# Altium PCB F429-F7-核心板整体封装.PcbDoc
Units mil, origin at the board's own origin, x right, y up, seen from the top; angles counter-clockwise.
Board outline 3322.65 x 1870.08 mil, 6 copper layers (Top, GND2, ART3, ART4, POWER5, Bottom), stack 58.1 mil thick; 9 components, 1 nets, 174 pads, 0 vias.
Unrouted connection lines stored in the file: 1.
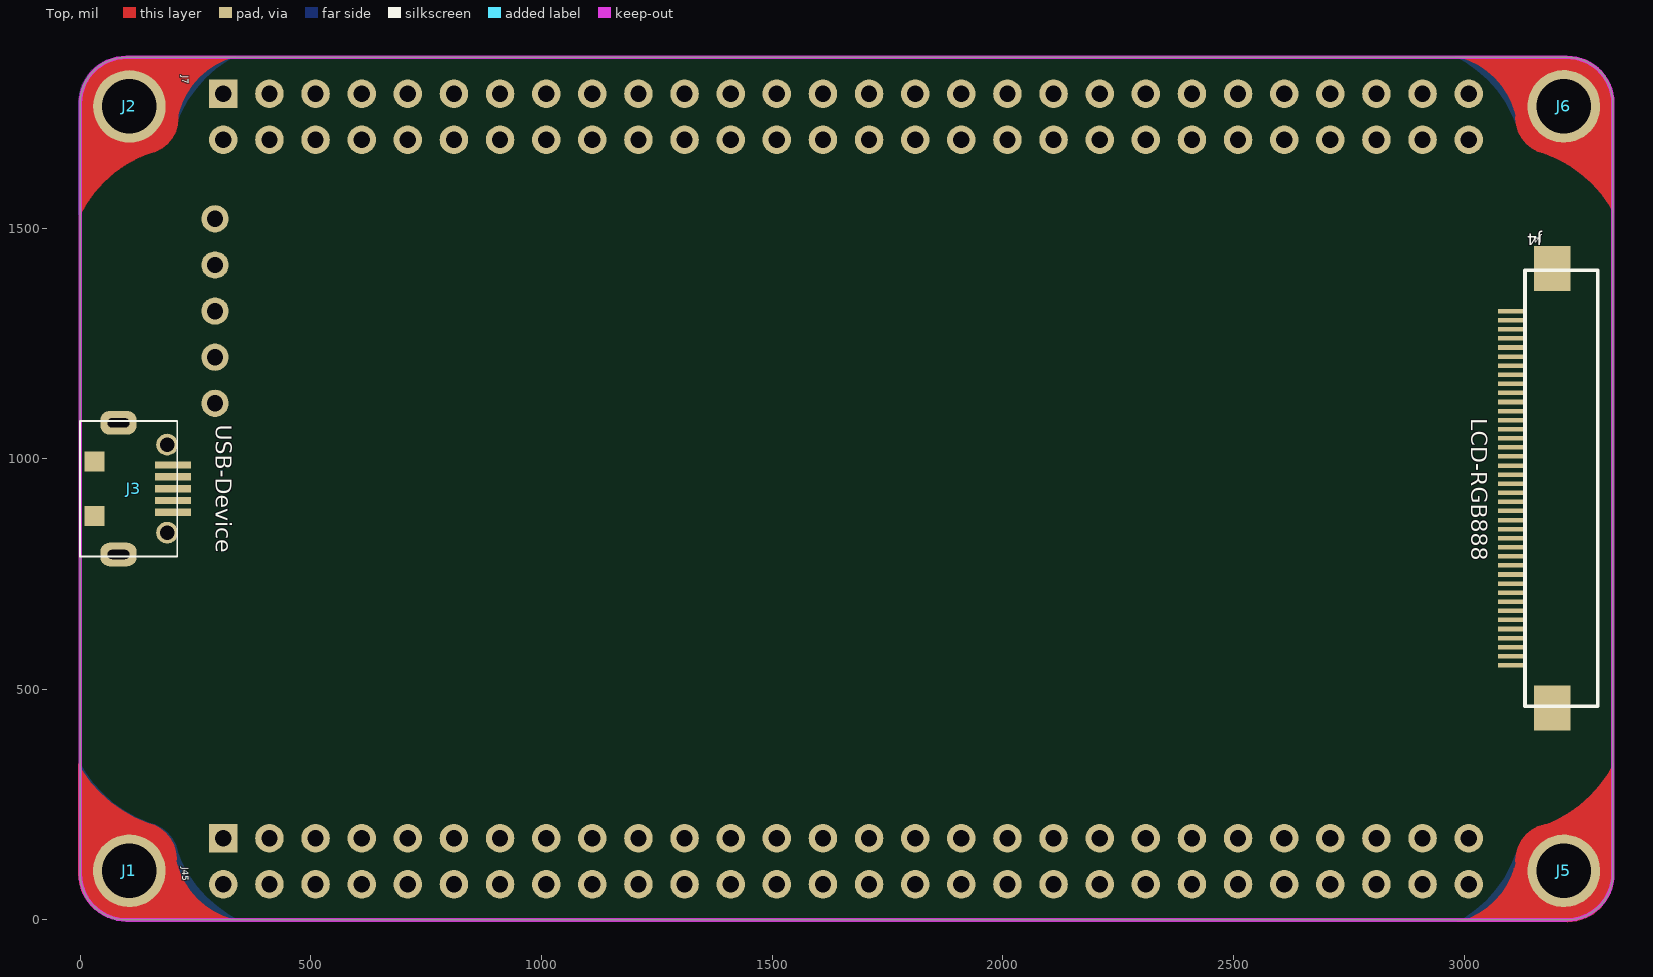
[diagram p0: Top view]
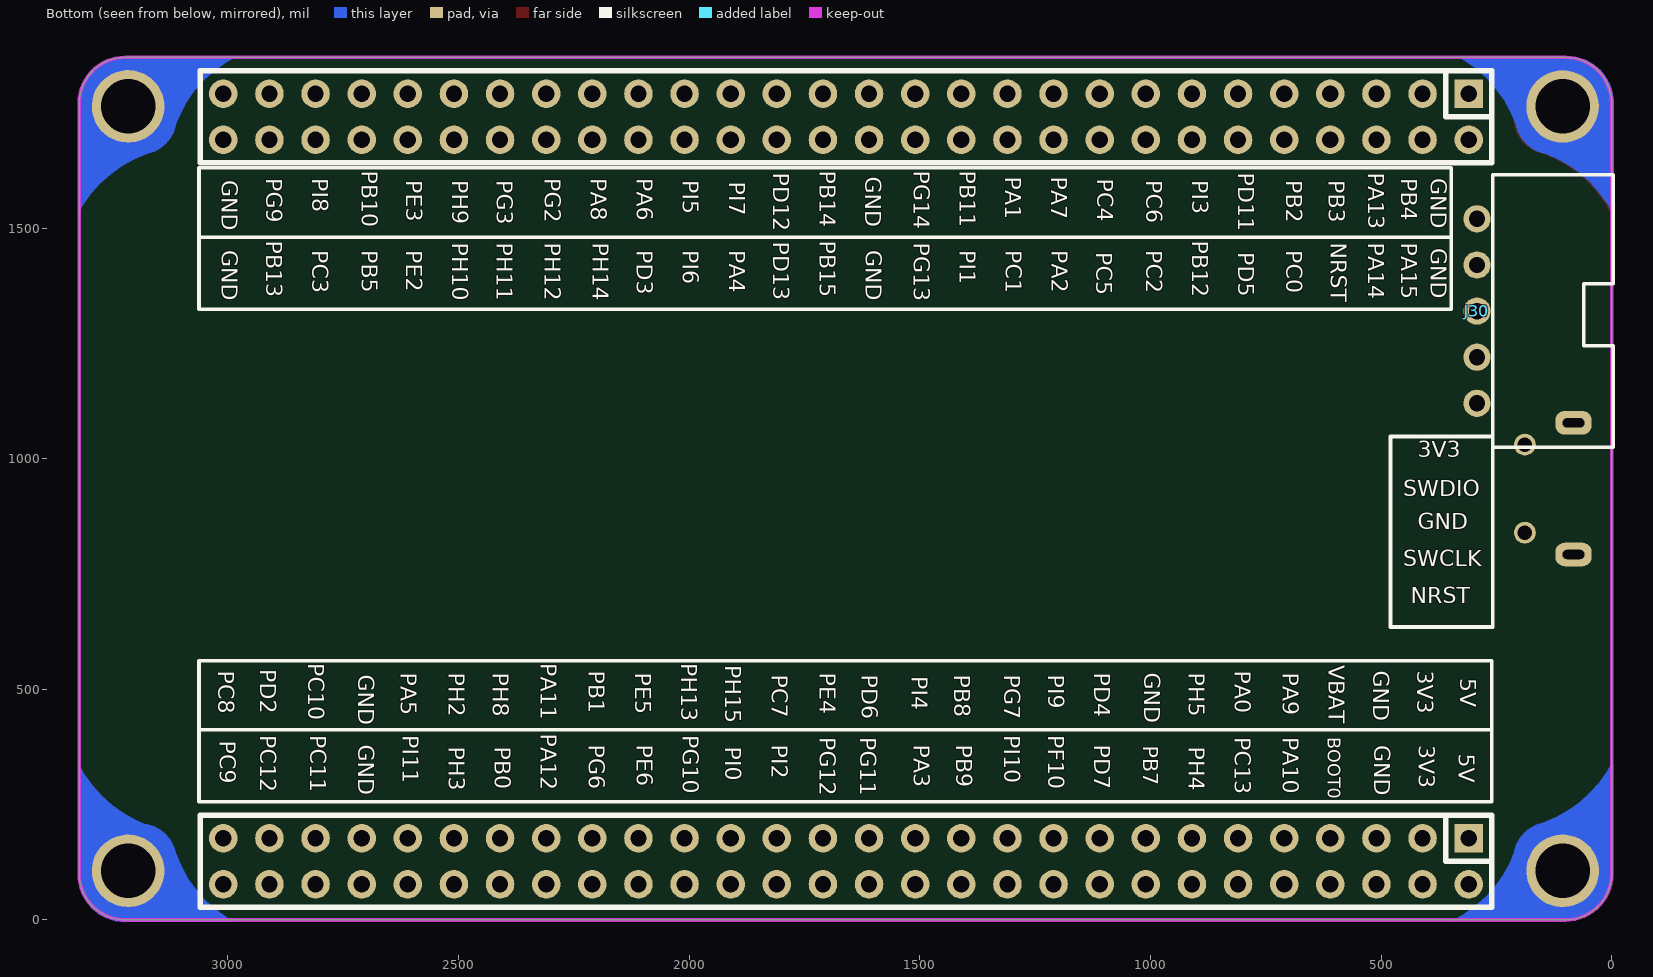
[diagram p1: Bottom view, seen from below]

## Layer stack, top to bottom
Solder Mask Top: solder mask 0.4, Solder Resist, Dk 3.5
Top: signal copper 1.35
Dielectric 1: dielectric 10, FR-4, Dk 4.3
GND2: signal copper 1.35
Dielectric2: dielectric 10, FR-4, Dk 4.3
ART3: signal copper 1.35
Dielectric3: dielectric 10, FR-4, Dk 4.3
ART4: signal copper 1.35
Dielectric4: dielectric 10, FR-4, Dk 4.3
POWER5: signal copper 1.35
Dielectric5: dielectric 10, FR-4, Dk 4.3
Bottom: signal copper 1.35
Solder Mask Bottom: solder mask 0.4, Solder Resist, Dk 3.5

## Board outline
0,1770.08 cw(c100,1770.08) 100,1870.08 3222.65,1870.08 cw(c3222.65,1770.08) 3322.65,1770.08 3322.65,100 cw(c3222.65,100) 3222.65,0 100,0 cw(c100,100) 0,100

## Design rules (kind name [scope] priority, off if disabled: settings)
Clearance "Clearance - Default - DEFAULT- SMD" [IsVia vs IsSMTPin] p1: gap=6 ignorepadtopadclearanceinfootprint=FALSE
Clearance "Clearance - Default - DEFAULT - Via" [IsVia vs IsVia] p2: gap=6 ignorepadtopadclearanceinfootprint=FALSE
Clearance "Clearance - Default - DEFAULT - Net" [All] p3: gap=8 ignorepadtopadclearanceinfootprint=FALSE except(0: Arc-Hole Track-Hole SMDPad-Hole THPad-Hole Via-Hole Fill-Hole Poly-Hole Region-Hole Text-Hole; 7: SMDPad-SMDPad; 10: Text-Text)
ComponentClearance "ComponentClearance - Default - DEFAULT" [All] p1: gap=6 collisioncheckmode=3 verticalgap=10 showdistances=FALSE
HoleToHoleClearance "HoleToHoleClearance - Default - DEFAULT" [All] p1: gap=6 allowstackedmicrovias=TRUE
Length "Default Length" [All] p1: maxlimit=50000 minlimit=0
MaxMinImpedance "Default Impedance" [All] p1: minimum=50.00 maximum=150.0
ParallelSegment "Default Parallel Segment Same Layer" [All] p1: limit=1000 gap=200
ParallelSegment "Default Parallel Segment Adjasent" [All] p2: limit=1000 gap=200
PlaneConnect "Default PlaneConnect" [All] p1: planeconnectstyle=Relief reliefexpansion=20 reliefentries=4 reliefconductorwidth=15 reliefairgap=10
PolygonConnect "PolygonConnect - Default SMT" [IsSMTPin] p1: connectstyle=Relief reliefconductorwidth=10 reliefentries=4 polygonreliefangle="45 Angle" airgapwidth=10
PolygonConnect "PolygonConnect - Default Pad" [All] p2: connectstyle=Relief reliefconductorwidth=15 reliefentries=4 polygonreliefangle="45 Angle" airgapwidth=10
RoutingLayers "RoutingLayers - Default - DEFAULT" [All] p1: top layer_v5=TRUE mid layer 1_v5=TRUE mid layer 2_v5=TRUE mid layer 3_v5=TRUE mid layer 4_v5=TRUE bottom layer_v5=TRUE
RoutingPriority "RoutingPriority - Default - DEFAULT" [All] p1: routingpriority=3
RoutingTopology "Default Routing Topology" [All] p1: topology=Shortest
RoutingVias "RoutingVias - Default - DEFAULT" [All] p1: holewidth=12 width=18 viastyle="Through Hole" minholewidth=12 minwidth=18 maxholewidth=12 maxwidth=18
SMDToCorner "SMDToCorner - Default - DEFAULT" [All] p1: distance=60000
SolderMaskExpansion "SolderMaskExpansion from CAM settings" [All] p1: expansion=5
Width "Default Width" [All] p1: maxlimit=100 minlimit=6 preferedwidth=8
22 further rules are at their usual default settings.

## Components (designator, comment, footprint, x,y, rotation, side; value= is the part's Value field where it differs from the comment)
J1 "3.0MM" 3.0MM 106.3,106.3 r357 top
J2 "3.0MM" 3.0MM 106.3,1763.78 r0 top
J3 "MICRO_USB_5S" MICRO_USB_5S 200.79,935.04 r270 top
J4 "40P-FPC-0.5" 40P-FPC-0.5 3270,1556 r270 top
J5 "3.0MM" 3.0MM 3216.54,106.3 r3 top
J6 "3.0MM" 3.0MM 3216.54,1763.78 r3 top
J7 "2X28X2.54MM" 2X28X2.54MM 310,1791.34 r270 top
J30 "XH2.54-5P" XH2.54-5P 292,1320 r90 bottom
J45 "2X28X2.54MM" 2X28X2.54MM 310,177.17 r270 top

## Footprints (in the part's own frame and the unit in brackets; to place one, negate y for a bottom-side part, rotate by r counter-clockwise, add the part's x,y. Pads: shape width x height; smd on the part's side, far side on the other; paste and mask are expansions set on the pad)
2X28X2.54MM [mil]
  rect 62x62 hole 35.43: 1(0,0)
  round 62 hole 35.43: 2(100,0) 3(0,100) 4(100,100) 5(0,200) 6(100,200) 7(0,300) 8(100,300) 9(0,400) 10(100,400) 11(0,500) 12(100,500) 13(0,600) 14(100,600) 15(0,700) 16(100,700) 17(0,800) 18(100,800) 19(0,900) 20(100,900) 21(0,1000) 22(100,1000) 23(0,1100) 24(100,1100) 25(0,1200) 26(100,1200) 27(0,1300) 28(100,1300) 29(0,1400) 30(100,1400) 31(0,1500) 32(100,1500) 33(0,1600) 34(100,1600) 35(0,1700) 36(100,1700) 37(0,1800) 38(100,1800) 39(0,1900) 40(100,1900) 41(0,2000) 42(100,2000) 43(0,2100) 44(100,2100) 45(0,2200) 46(100,2200) 47(0,2300) 48(100,2300) 49(0,2400) 50(100,2400) 51(0,2500) 52(100,2500) 53(0,2600) 54(100,2600) 55(0,2700) 56(100,2700)
3.0MM [mm]
  round 4 hole 3: 1(0,0)
40P-FPC-0.5 [mm]
  rect 0.25x1.5 smd: 1(6,-4.25) 2(6.5,-4.25) 3(7,-4.25) 4(7.5,-4.25) 5(8,-4.25) 6(8.5,-4.25) 7(9,-4.25) 8(9.5,-4.25) 9(10,-4.25) 10(10.5,-4.25) 11(11,-4.25) 12(11.5,-4.25) 13(12,-4.25) 14(12.5,-4.25) 15(13,-4.25) 16(13.5,-4.25) 17(14,-4.25) 18(14.5,-4.25) 19(15,-4.25) 20(15.5,-4.25) 21(16,-4.25) 22(16.5,-4.25) 23(17,-4.25) 24(17.5,-4.25) 25(18,-4.25) 26(18.5,-4.25) 27(19,-4.25) 28(19.5,-4.25) 29(20,-4.25) 30(20.5,-4.25) 31(21,-4.25) 32(21.5,-4.25) 33(22,-4.25) 34(22.5,-4.25) 35(23,-4.25) 36(23.5,-4.25) 37(24,-4.25) 38(24.5,-4.25) 39(25,-4.25) 40(25.5,-4.25)
  rect 2.5x2 smd: 41(27.85,-2) 42(3.65,-2)
  silkscreen extent 3.75,-3.5 27.75,0.5
MICRO_USB_5S [mm]
  rect 0.4x2 smd: 1(-1.3,0) 2(-0.65,0) 3(0,0) 4(0.65,0) 5(1.3,0)
  round 1.2 hole 0.8: 6(-2.425,-0.32) 7(2.425,-0.32)
  rrect77% 1.3x2 hole 0.5 slot 1.2 at 90 deg: 8(-3.625,-3) 9(3.625,-3)
  rect 1.1x1.1 smd: 10(-1.5,-4.31) 11(1.5,-4.31)
  silkscreen extent -3.73,-5.12 3.73,0.24
XH2.54-5P [mm]
  round 1.5 hole 0.9: 1(-5.08,0) 2(-2.54,0) 3(0,0) 4(2.54,0) 5(5.08,0)
  silkscreen extent -7.5,-7.5 7.5,-0.87

## Nets (pads, with @x,y where several pads share a name; then routed paths per layer and width w, separated by ;. In a path a pad name is that pad's centre, name@x,y a point inside that pad or via, vN(x,y) a via of type N, cw(c..) or ccw(c..) an arc to the next point about the centre after c; other vN are vias at no path point)
3V3: J30.5 J45.3
pads on no net: J1.1 J2.1 J3.1 J3.2 J3.3 J3.4 J3.5 J3.6 J3.7 J3.8 J3.9 J3.10 J3.11 J4.1 J4.2 J4.3 J4.4 J4.5 J4.6 J4.7 J4.8 J4.9 J4.10 J4.11 J4.12 J4.13 J4.14 J4.15 J4.16 J4.17 J4.18 J4.19 J4.20 J4.21 J4.22 J4.23 J4.24 J4.25 J4.26 J4.27 J4.28 J4.29 J4.30 J4.31 J4.32 J4.33 J4.34 J4.35 J4.36 J4.37 J4.38 J4.39 J4.40 J4.41 J4.42 J5.1 J6.1 J7.1 J7.2 J7.3 J7.4 J7.5 J7.6 J7.7 J7.8 J7.9 J7.10 J7.11 J7.12 J7.13 J7.14 J7.15 J7.16 J7.17 J7.18 J7.19 J7.20 J7.21 J7.22 J7.23 J7.24 J7.25 J7.26 J7.27 J7.28 J7.29 J7.30 J7.31 J7.32 J7.33 J7.34 J7.35 J7.36 J7.37 J7.38 J7.39 J7.40 J7.41 J7.42 J7.43 J7.44 J7.45 J7.46 J7.47 J7.48 J7.49 J7.50 J7.51 J7.52 J7.53 J7.54 J7.55 J7.56 J30.1 J30.2 J30.3 J30.4 J45.1 J45.2 J45.4 J45.5 J45.6 J45.7 J45.8 J45.9 J45.10 J45.11 J45.12 J45.13 J45.14 J45.15 J45.16 J45.17 J45.18 J45.19 J45.20 J45.21 J45.22 J45.23 J45.24 J45.25 J45.26 J45.27 J45.28 J45.29 J45.30 J45.31 J45.32 J45.33 J45.34 J45.35 J45.36 J45.37 J45.38 J45.39 J45.40 J45.41 J45.42 J45.43 J45.44 J45.45 J45.46 J45.47 J45.48 J45.49 J45.50 J45.51 J45.52 J45.53 J45.54 J45.55 J45.56

## Keep-outs
Keep-Out Layer:
  the board outline again, w8

## Other copper
Top:
  region: 3120,112 3120,-4 3108,-4 3108,112
  region: 112,204 -4,204 -4,216 112,216
  region: 3116,1872 3224,1872.48 3243.6,1870.55 3262.45,1864.84 3279.83,1855.55 3295.05,1843.05 3307.55,1827.83 3316.83,1810.45 3322.55,1791.6 3324.48,1772 3324,1772 3324,1664 3215.96,1663.93 3205.87,1660.87 3190.44,1659.36 3175.01,1660.87 3160.18,1665.38 3146.5,1672.68 3134.52,1682.52 3124.68,1694.5 3117.38,1708.18 3112.87,1723.01 3111.35,1738.44 3112.87,1753.87 3115.97,1764.09 3116,1764
  region: 208,1712 208,1872 339.52,1872.12 334.53,1871.13 313.3,1863.92 293.2,1854.01 274.56,1841.56 257.71,1826.78 242.93,1809.92 230.47,1791.28 220.56,1771.18 213.35,1749.95 208.98,1727.97 207.94,1712.17
  region: 0,1656 0,1668 116,1668 116,1656
  region: 3324,340.07 3324,204 3168.06,203.74 3171.18,204.64 3199.26,216.27 3225.85,230.97 3250.64,248.56 3273.3,268.81 3293.55,291.47 3311.13,316.25 3324.26,340.01
  region: 0,1664 -0.48,1772 1.45,1791.6 7.16,1810.45 16.45,1827.83 28.95,1843.05 44.17,1855.55 61.55,1864.84 80.4,1870.55 100,1872.48 100,1872 208,1872 208.07,1763.96 211.13,1753.87 212.64,1738.44 211.13,1723.01 206.62,1708.18 199.32,1694.5 189.48,1682.52 177.5,1672.68 163.82,1665.38 148.99,1660.87 133.56,1659.36 118.13,1660.87 107.91,1663.97 108,1664
  region: 204,0 96,-0.48 76.4,1.45 57.55,7.17 40.17,16.45 24.95,28.95 12.45,44.17 3.16,61.55 -2.55,80.4 -4.48,100 -4,100 -4,208 104.04,208.07 114.13,211.13 129.56,212.65 144.99,211.13 159.82,206.62 173.5,199.32 185.48,189.48 195.32,177.5 202.62,163.82 207.13,148.99 208.64,133.56 207.13,118.13 204.03,107.91 204,108
  region: 3116,156 3116,-4 2984.64,-4.06 2990.19,-2.96 3011.29,4.2 3031.27,14.06 3049.8,26.44 3066.56,41.13 3081.25,57.89 3093.63,76.42 3103.49,96.4 3110.65,117.51 3115,139.36 3116.09,155.96
  region: 156,208 -4,208 -4.02,339.46 5.23,322.72 22.82,297.93 43.08,275.26 65.75,255 90.54,237.41 117.15,222.7 145.24,211.07 156.08,207.95
  region: 204,1756 204,1872 216,1872 216,1756
  region: 340.07,0 204,0 203.99,156.11 204.73,144.81 209.1,122.88 216.28,101.7 226.17,81.65 238.59,63.06 253.34,46.25 270.15,31.51 288.74,19.08 308.79,9.19 329.97,2.01 339.91,0.03
  region: 3164,1664 3324,1664 3324.02,1532.55 3314.77,1549.28 3297.18,1574.07 3276.92,1596.74 3254.25,1617 3229.46,1634.59 3202.85,1649.3 3174.76,1660.93 3163.92,1664.05
  region: 2979.93,1872 3116,1872 3116,1716.03 3115.24,1727.59 3110.89,1749.45 3103.73,1770.55 3093.87,1790.54 3081.49,1809.06 3066.8,1825.82 3050.05,1840.51 3031.52,1852.89 3011.53,1862.75 2990.43,1869.91 2979.94,1872
  region: 3208,1668 3324,1668 3324,1656 3208,1656
  region: 3324,204 3324.48,96 3322.55,76.4 3316.83,57.55 3307.55,40.17 3295.05,24.95 3279.83,12.45 3262.45,3.17 3243.6,-2.55 3224,-4.48 3224,-4 3116,-4 3115.93,104.04 3112.87,114.13 3111.35,129.56 3112.87,144.99 3117.38,159.82 3124.68,173.5 3134.52,185.48 3146.5,195.32 3160.18,202.62 3175.01,207.13 3190.44,208.65 3205.87,207.13 3216.09,204.03 3216,204
  region: 212,0 200,0 200,116 212,116
  region: 3108,1872 3120,1872 3120,1756 3108,1756
  region: 0,1527.93 0,1664 155.94,1664.26 152.82,1663.36 124.74,1651.73 98.15,1637.03 73.36,1619.44 50.7,1599.19 30.45,1576.53 12.87,1551.75 -0.26,1527.99
  region: 3324,212 3324,200 3208,200 3208,212
Bottom:
  region: 3116,156 3116,-4 2984.55,-4.02 3001.28,5.23 3026.07,22.82 3048.74,43.08 3069,65.75 3086.59,90.54 3101.3,117.15 3112.93,145.24 3116.05,156.08
  region: -4,1656 -4,1668 112,1668 112,1656
  region: 3208,1668 3324,1668 3324,1656 3208,1656
  region: 208,0 100,-0.48 80.4,1.45 61.55,7.17 44.17,16.45 28.95,28.95 16.45,44.17 7.16,61.55 1.45,80.4 -0.48,100 0,100 0,208 108.04,208.07 118.13,211.13 133.56,212.65 148.99,211.13 163.82,206.62 177.5,199.32 189.48,189.48 199.32,177.5 206.62,163.82 211.13,148.99 212.64,133.56 211.13,118.13 208.03,107.91 208,108
  region: 3116,1872 3224,1872.48 3243.6,1870.55 3262.45,1864.84 3279.83,1855.55 3295.05,1843.05 3307.55,1827.83 3316.83,1810.45 3322.55,1791.6 3324.48,1772 3324,1772 3324,1664 3215.96,1663.93 3205.87,1660.87 3190.44,1659.36 3175.01,1660.87 3160.18,1665.38 3146.5,1672.68 3134.52,1682.52 3124.68,1694.5 3117.38,1708.18 3112.87,1723.01 3111.35,1738.44 3112.87,1753.87 3115.97,1764.09 3116,1764
  region: 2979.93,1872 3116,1872 3116.26,1716.06 3115.36,1719.18 3103.73,1747.26 3089.03,1773.85 3071.44,1798.64 3051.19,1821.3 3028.53,1841.55 3003.75,1859.13 2979.99,1872.26
  region: 116,204 0,204 0,216 116,216
  region: -4,1664 -4.48,1772 -2.55,1791.6 3.16,1810.45 12.45,1827.83 24.95,1843.05 40.17,1855.55 57.55,1864.84 76.4,1870.55 96,1872.48 96,1872 204,1872 204.07,1763.96 207.13,1753.87 208.64,1738.44 207.13,1723.01 202.62,1708.18 195.32,1694.5 185.48,1682.52 173.5,1672.68 159.82,1665.38 144.99,1660.87 129.56,1659.36 114.13,1660.87 103.91,1663.97 104,1664
  region: 216,0 204,0 204,116 216,116
  region: 204,1712 204,1872 335.46,1872.02 318.72,1862.77 293.93,1845.18 271.26,1824.92 251,1802.25 233.41,1777.46 218.7,1750.85 207.07,1722.76 203.95,1711.92
  region: 3324,340.07 3324,204 3168.06,203.74 3171.18,204.64 3199.26,216.27 3225.85,230.97 3250.64,248.56 3273.3,268.81 3293.55,291.47 3311.13,316.25 3324.26,340.01
  region: 200,1756 200,1872 212,1872 212,1756
  region: 3164,1664 3324,1664 3324.02,1532.55 3314.77,1549.28 3297.18,1574.07 3276.92,1596.74 3254.25,1617 3229.46,1634.59 3202.85,1649.3 3174.76,1660.93 3163.92,1664.05
  region: 344.07,0 208,0 207.74,155.94 208.64,152.82 220.27,124.74 234.97,98.15 252.56,73.36 272.81,50.7 295.47,30.45 320.25,12.87 344.01,-0.26
  region: 3120,112 3120,-4 3108,-4 3108,112
  region: -4,1527.93 -4,1664 151.94,1664.26 148.82,1663.36 120.74,1651.73 94.15,1637.03 69.36,1619.44 46.7,1599.19 26.45,1576.53 8.87,1551.75 -4.26,1527.99
  region: 3324,212 3324,200 3208,200 3208,212
  region: 3324,204 3324.48,96 3322.55,76.4 3316.83,57.55 3307.55,40.17 3295.05,24.95 3279.83,12.45 3262.45,3.17 3243.6,-2.55 3224,-4.48 3224,-4 3116,-4 3115.93,104.04 3112.87,114.13 3111.35,129.56 3112.87,144.99 3117.38,159.82 3124.68,173.5 3134.52,185.48 3146.5,195.32 3160.18,202.62 3175.01,207.13 3190.44,208.65 3205.87,207.13 3216.09,204.03 3216,204
  region: 160,208 0,208 -0.02,339.46 9.23,322.72 26.82,297.93 47.08,275.26 69.75,255 94.54,237.41 121.15,222.7 149.24,211.07 160.08,207.95
  region: 3108,1872 3120,1872 3120,1756 3108,1756

## Silkscreen, mask and mechanical layers (free items; w line width, h text height)
Silkscreen Top:
  text "LCD-RGB888" at 3004,1088 h60 r270
  text "USB-Device" at 282,1074 h60 r270
Silkscreen Bottom:
  lines w8: 260,412 3058.35,412 ; 348,1480 3062.35,1480 ; 258,635.17 479.35,635.17 479.35,1048 258,1048 258,635.17 ; 260,256 260,562 3062.7,562 3062.7,256 260,256 ; 348,1324 348,1630.84 3062.71,1630.84 3062.71,1324 348,1324
  text "PB11" at 1425.35,1624 h60 r90
  text "PG14" at 1525.35,1624 h60 r90
  text "PB14" at 1729.35,1624 h60 r90
  text "PB10" at 2721.35,1624 h60 r90
  text "PA13" at 540,1620 h60 r90
  text "PD11" at 821.35,1620 h60 r90
  text "PD12" at 1830,1620 h60 r90
  text "PA7" at 1226.71,1610.84 h60 r90
  text "PA1" at 1326.71,1610.84 h60 r90
  text "GND" at 1630.71,1610.84 h60 r90
  text "GND" at 404,1608 h60 r90
  text "PB4" at 468,1608 h60 r90
  text "PA6" at 2125.35,1608 h60 r90
  text "PA8" at 2225.35,1608 h60 r90
  text "PG2" at 2325.35,1608 h60 r90
  text "PI8" at 2829.35,1608 h60 r90
  text "PG9" at 2929.35,1608 h60 r90
  text "PC4" at 1126.71,1606.84 h60 r90
  text "PB3" at 625.35,1604 h60 r90
  text "PB2" at 717.35,1604 h60 r90
  text "PI3" at 921.35,1604 h60 r90
  text "PC6" at 1021.35,1604 h60 r90
  text "PI5" at 2025.35,1604 h60 r90
  text "PG3" at 2429.35,1604 h60 r90
  text "PH9" at 2525.35,1604 h60 r90
  text "PE3" at 2625.35,1604 h60 r90
  text "GND" at 3025.35,1604 h60 r90
  text "PI7" at 1925.35,1600 h60 r90
  text "PB12" at 921.35,1472 h60 r90
  text "PB15" at 1729.35,1472 h60 r90
  text "PB13" at 2929.35,1472 h60 r90
  text "PD13" at 1830,1470 h60 r90
  text "PA15" at 468,1468 h60 r90
  text "PA14" at 540,1468 h60 r90
  text "NRST" at 621.35,1468 h60 r90
  text "PG13" at 1525.35,1468 h60 r90
  text "PH14" at 2221.35,1468 h60 r90
  text "PH12" at 2325.35,1468 h60 r90
  text "PH11" at 2429.35,1468 h60 r90
  text "PH10" at 2525.35,1468 h60 r90
  text "GND" at 404,1456 h60 r90
  text "PC0" at 717.35,1452 h60 r90
  text "PC2" at 1021.35,1452 h60 r90
  text "PA2" at 1225.35,1452 h60 r90
  text "PC1" at 1325.35,1452 h60 r90
  text "PI1" at 1425.35,1452 h60 r90
  text "GND" at 1629.35,1452 h60 r90
  text "PA4" at 1925.35,1452 h60 r90
  text "PI6" at 2025.35,1452 h60 r90
  text "PD3" at 2125.35,1452 h60 r90
  text "PE2" at 2625.35,1452 h60 r90
  text "PB5" at 2721.35,1452 h60 r90
  text "PC3" at 2829.35,1452 h60 r90
  text "GND" at 3025.35,1452 h60 r90
  text "PD5" at 821.35,1448 h60 r90
  text "PC5" at 1129.35,1448 h60 r90
  text "3V3" at 420,991.17 h60
  text "SWDIO" at 452,907.17 h60
  text "GND" at 420,835.17 h60
  text "SWCLK" at 452,755.17 h60
  text "NRST" at 436,675.17 h60
  text "PH13" at 2029.35,556 h60 r90
  text "PA11" at 2333.35,556 h60 r90
  text "PC10" at 2837.35,556 h60 r90
  text "VBAT" at 625.35,552 h60 r90
  text "PH15" at 1933.35,552 h60 r90
  text "PD2" at 2941.35,544 h60 r90
  text "3V3" at 433.35,540 h60 r90
  text "GND" at 529.35,540 h60 r90
  text "PA0" at 829.35,540 h60 r90
  text "PB1" at 2229.35,540 h60 r90
  text "PC8" at 3033.35,540 h60 r90
  text "PA9" at 725.35,536 h60 r90
  text "PH5" at 929.35,536 h60 r90
  text "GND" at 1025.35,536 h60 r90
  text "PD4" at 1133.35,536 h60 r90
  text "PE4" at 1729.35,536 h60 r90
  text "PE5" at 2129.35,536 h60 r90
  text "PH8" at 2437.35,536 h60 r90
  text "PH2" at 2533.35,536 h60 r90
  text "PA5" at 2637.35,536 h60 r90
  text "PI9" at 1233.35,532 h60 r90
  text "PG7" at 1329.35,532 h60 r90
  text "PB8" at 1437.35,532 h60 r90
  text "PD6" at 1637.35,532 h60 r90
  text "PC7" at 1833.35,532 h60 r90
  text "GND" at 2729.35,532 h60 r90
  text "PI4" at 1529.35,528 h60 r90
  text "5V" at 340,524 h60 r90
  text "PA12" at 2333.35,404 h60 r90
  text "PF10" at 1233.35,400 h60 r90
  text "PI10" at 1329.35,400 h60 r90
  text "PG10" at 2025.35,400 h60 r90
  text "PI11" at 2633.35,400 h60 r90
  text "PC11" at 2833.35,400 h60 r90
  text "PC12" at 2941.35,400 h60 r90
  text "BOOT0" at 625.35,396 h48 r90
  text "PA10" at 725.35,396 h60 r90
  text "PC13" at 829.35,396 h60 r90
  text "PG11" at 1641.35,396 h60 r90
  text "PG12" at 1729.35,396 h60 r90
  text "PC9" at 3029.35,388 h60 r90
  text "PD7" at 1133.35,380 h60 r90
  text "PB9" at 1433.35,380 h60 r90
  text "PA3" at 1525.35,380 h60 r90
  text "PI2" at 1833.35,380 h60 r90
  text "PE6" at 2125.35,380 h60 r90
  text "PG6" at 2229.35,380 h60 r90
  text "GND" at 2729.35,380 h60 r90
  text "3V3" at 430.71,378.84 h60 r90
  text "GND" at 526.71,378.84 h60 r90
  text "PB7" at 1026,378 h55 r90
  text "PH4" at 929.35,376 h60 r90
  text "PI0" at 1933.35,376 h60 r90
  text "PB0" at 2433.35,376 h60 r90
  text "PH3" at 2533.35,376 h60 r90
  text "5V" at 344,360 h60 r90
Solder Mask Top:
  drawing of 16 lines, arcs and shapes, not listed
Solder Mask Bottom:
  drawing of 16 lines, arcs and shapes, not listed
Assembly Drawing Top:
  drawing of 896 lines, arcs and shapes, not listed
Layer_10:
  lines w8: 0,0 0,1870.08 3322.65,1870.08 3322.65,0 0,0
Layer_20:
  lines w1: 0,0 0.03,0 ; 0,1791.34 0.03,1791.34 ; 106.3,0 106.33,0 ; 106.3,936 106.33,936 ; 310,177.17 310.03,177.17 ; 3322.65,106.3 3322.68,106.3 ; 3322.65,1870.08 3322.68,1870.08 ; 3216.54,106.3 3216.56,106.3 ; 3216.54,106.3 3216.56,106.3 ; 0,1870.08 0.03,1870.08 0,1870.08 ; 310,0 310.03,0 310,0 ; 310,1791.34 310.03,1791.34 310,1791.34 ; 3216.54,0 3216.56,0
  lines w8: 0,0 0,177.17 310,177.17 310,0 0,0 ; 0,0 0,1870.08 3322.65,1870.08 3322.65,0 0,0
  lines w10: -694,0 -50,0 ; -694,1870.08 -50,1870.08 ; -538,0 260,0 -214,0 ; -538,1791.34 260,1791.34 ; -400,0 56.3,0 ; -400,936 56.3,936 ; -214,177.17 260,177.17 ; -164,-150 -164,0 ; -164,327.17 -164,177.17 ; 0,1841.34 0,2009.34 ; 0,1920.08 0,2213.17 ; 310,1841.34 310,2009.34 ; 3066.54,-121.7 3216.54,-121.7 ; 3216.54,-171.7 3216.54,56.3 ; 3266.54,0 3542.54,0 ; 3266.54,106.3 3542.54,106.3 ; 3322.65,-171.7 3322.65,56.3 ; 3322.65,1920.08 3322.65,2213.17 ; 3472.65,-121.7 3322.65,-121.7 ; 3492.54,-150 3492.54,0 ; 3492.54,256.3 3492.54,106.3 ; -644,0 -619,100 -669,100 -644,0 ; -644,0 -644,1870.08 ; -644,1870.08 -669,1770.08 -619,1770.08 -644,1870.08 ; -488,0 -463,100 -513,100 -488,0 ; -488,0 -488,1791.34 ; -488,1791.34 -513,1691.34 -463,1691.34 -488,1791.34 ; -350,0 -325,100 -375,100 -350,0 ; -350,0 -350,936 ; -350,936 -375,836 -325,836 -350,936 ; -164,0 -189,-100 -139,-100 -164,0 ; -164,177.17 -139,277.17 -189,277.17 -164,177.17 ; 0,1959.34 100,1934.34 100,1984.34 0,1959.34 ; 0,1959.34 310,1959.34 ; 0,2163.17 100,2138.17 100,2188.17 0,2163.17 ; 0,2163.17 3322.65,2163.17 ; 310,1959.34 210,1984.34 210,1934.34 310,1959.34 ; 3216.54,-121.7 3116.54,-96.7 3116.54,-146.7 3216.54,-121.7 ; 3322.65,-121.7 3422.65,-146.7 3422.65,-96.7 3322.65,-121.7 ; 3322.65,2163.17 3222.65,2188.17 3222.65,2138.17 3322.65,2163.17 ; 3492.54,0 3467.54,-100 3517.54,-100 3492.54,0 ; 3492.54,106.3 3517.54,206.3 3467.54,206.3 3492.54,106.3
  text "84.4mm" at 1492,2187.17 h50
  text "7.9mm" at 34,2025.17 h50
  text "47.5mm" at -692,783.17 h50 r90
  text "45.5mm" at -524,765.17 h50 r90
  text "23.8mm" at -374,345.17 h50 r90
  text "4.5mm" at -140,345.17 h50 r90
  text "2.7mm" at 3522.54,292.3 h50 r90
  text "2.7mm" at 2718.54,-139.7 h50